# Altium PCB PCB1.PcbDoc
Units mil, origin at the board's own origin, x right, y up, seen from the top; angles counter-clockwise.
Board outline 1775 x 1495 mil, 2 copper layers (Top Layer, Bottom Layer); 22 components, 51 nets, 85 pads, 0 vias.
Unrouted connection lines stored in the file: 43.
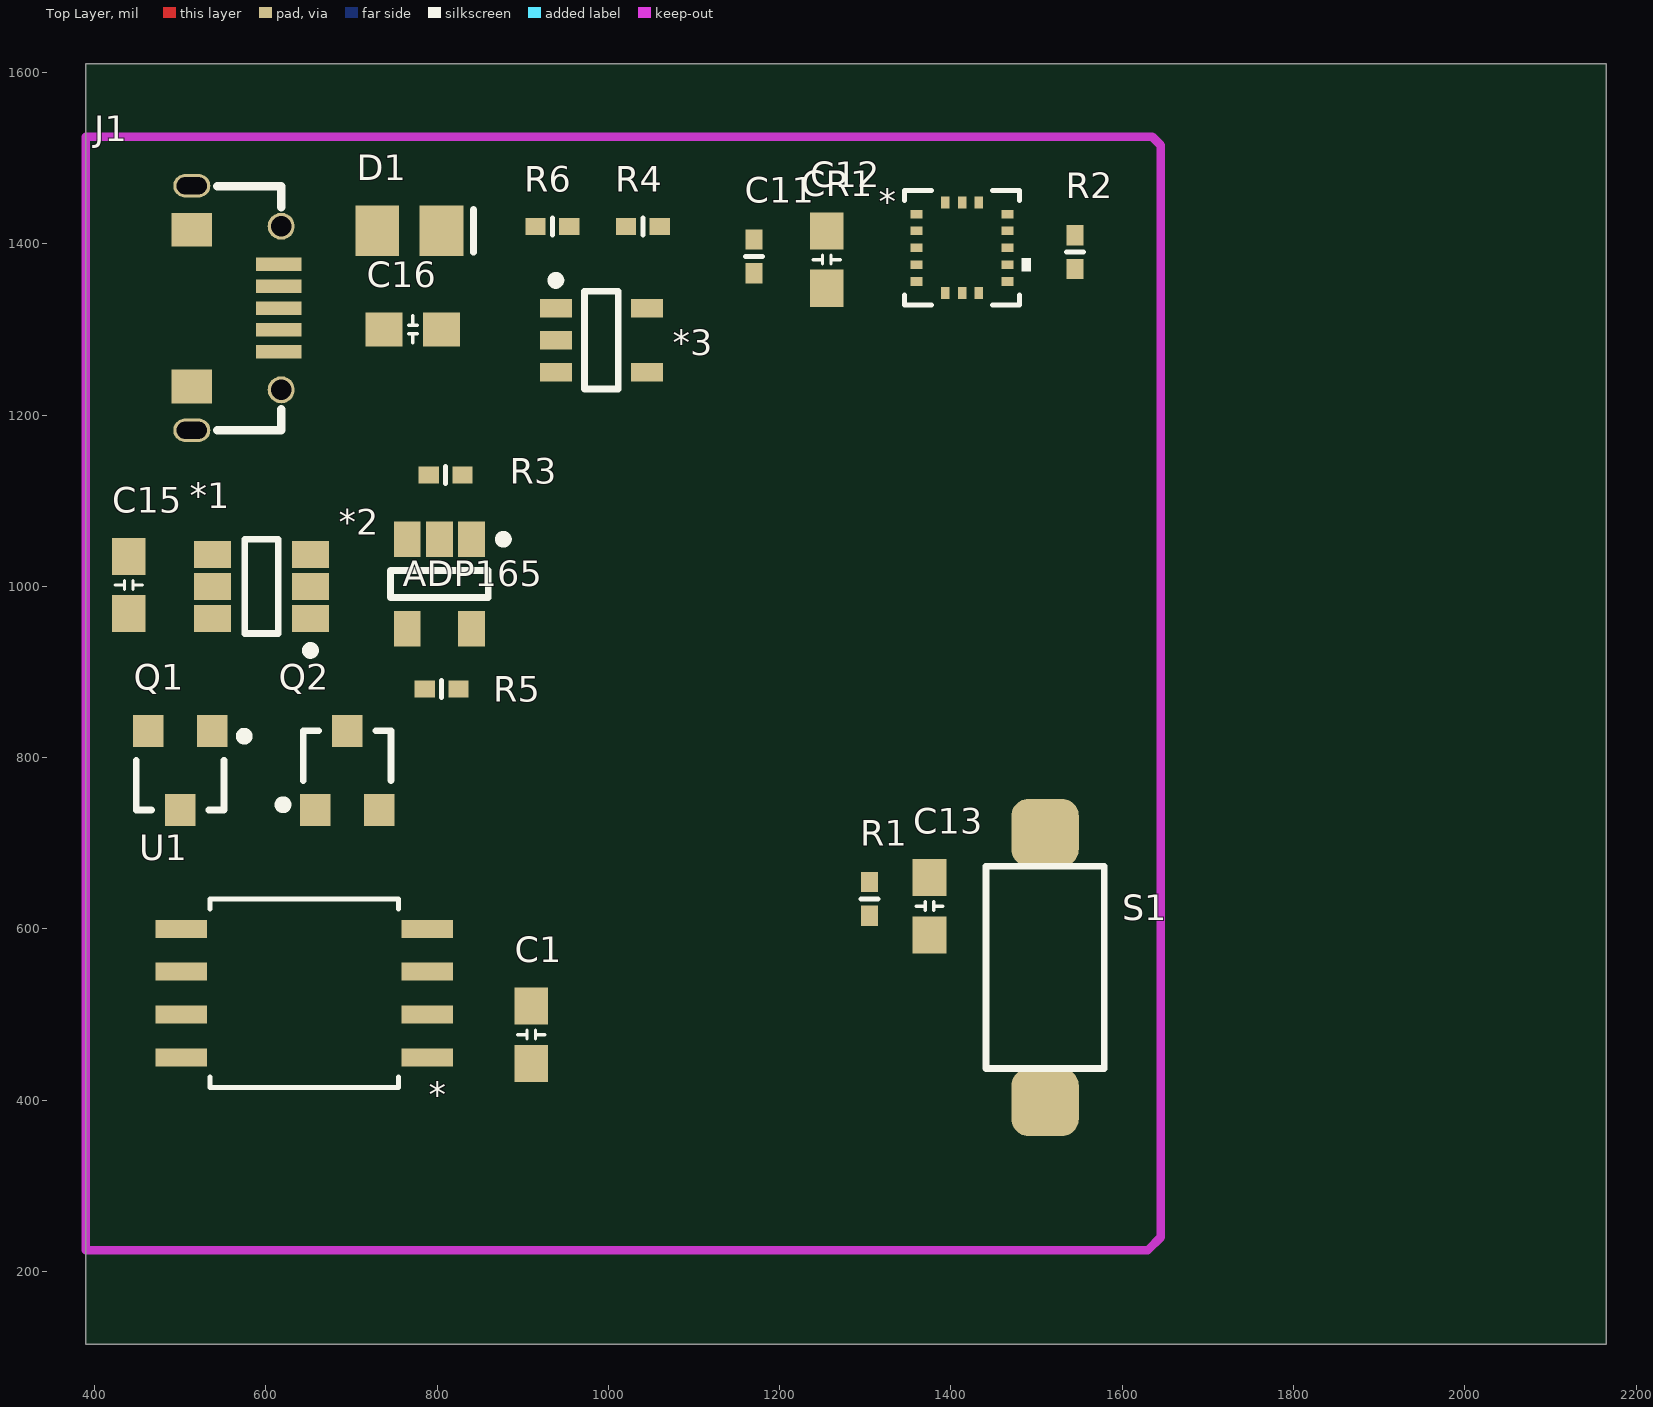
[diagram p0: Top Layer view]
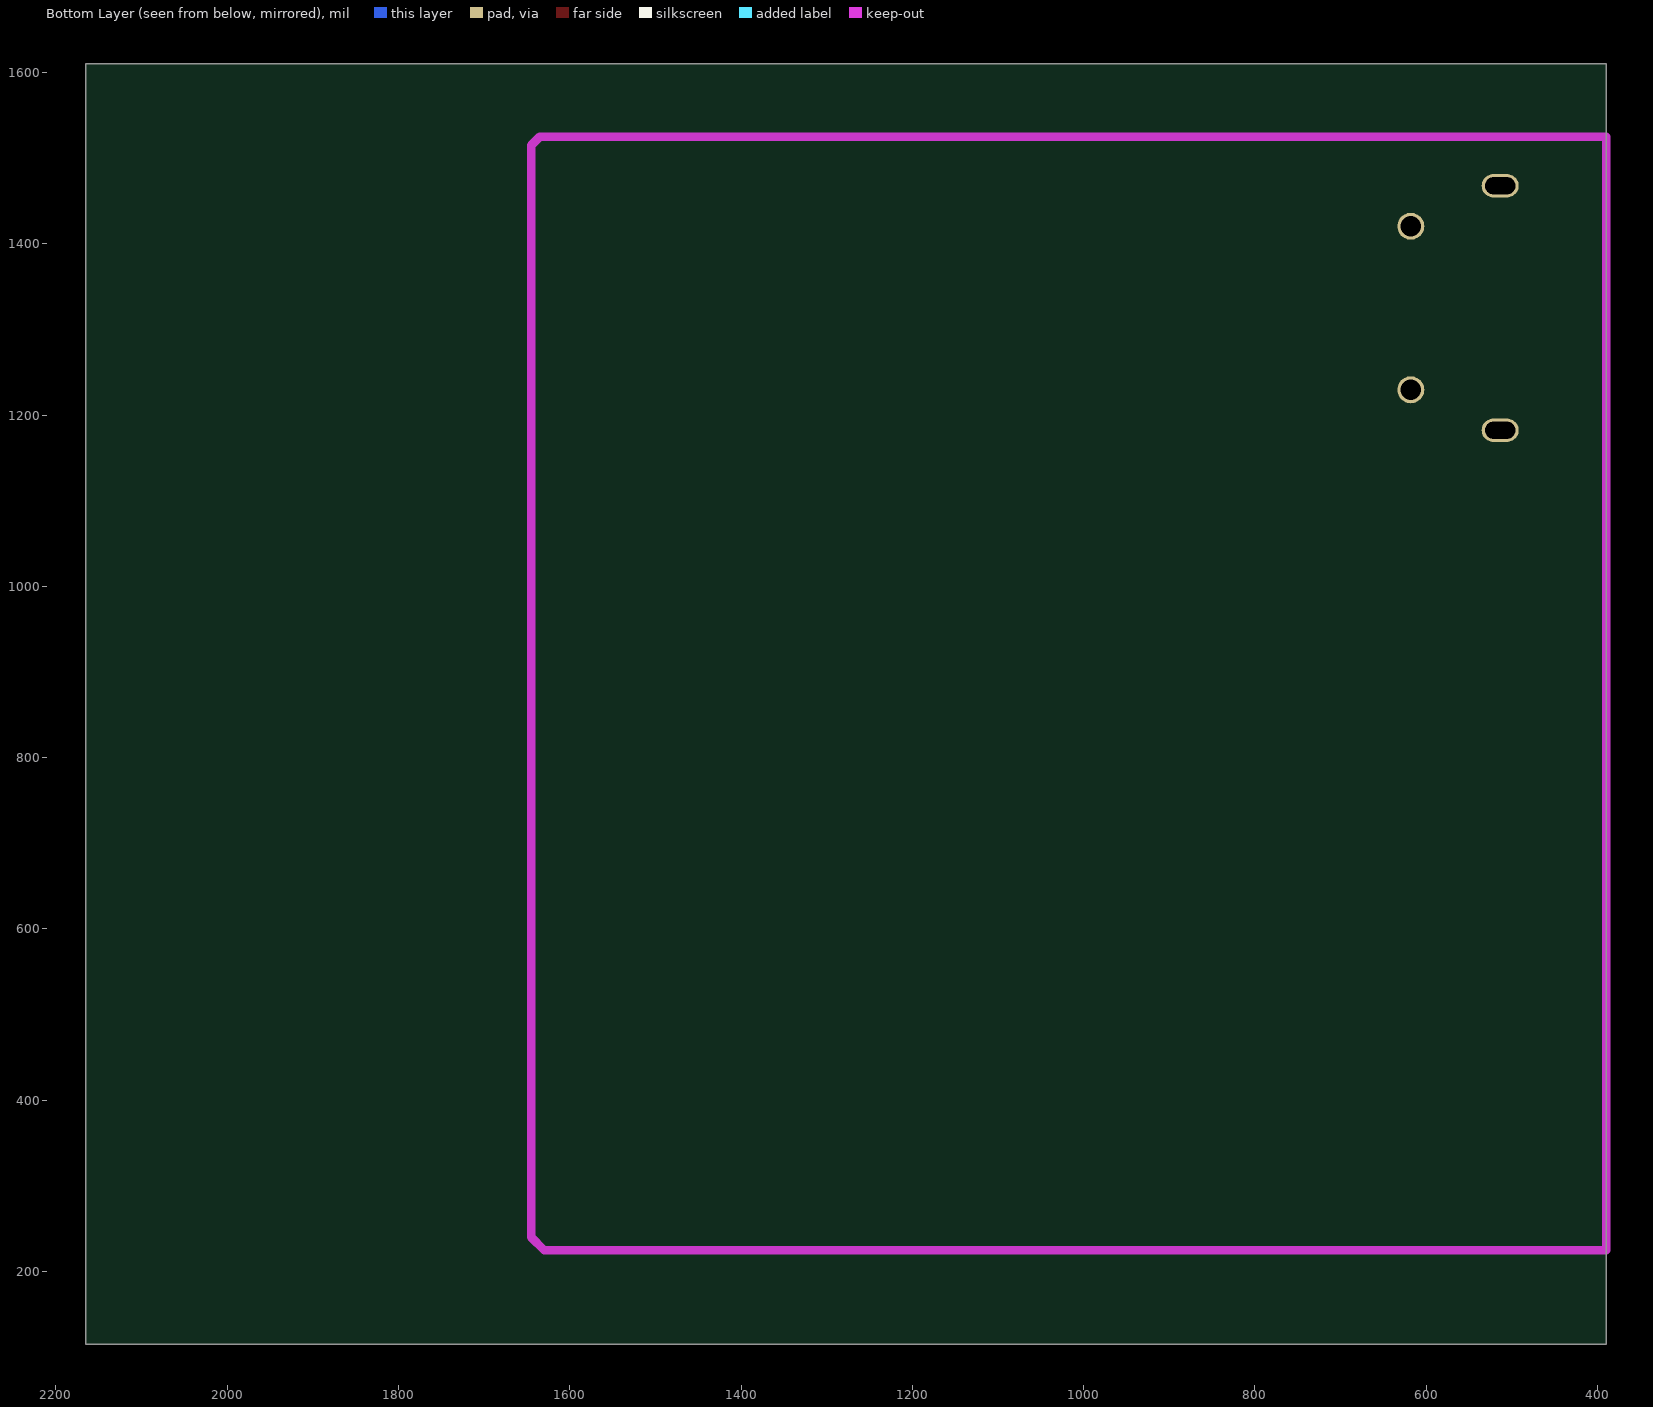
[diagram p1: Bottom Layer view, seen from below]

## Layer stack, top to bottom
Top Solder: solder mask 0.4, Solder Resist, Dk 3.5
Top Layer: signal copper 1.4
Dielectric 1: dielectric 12.6, FR-4, Dk 4.8
Bottom Layer: signal copper 1.4
Bottom Solder: solder mask 0.4, Solder Resist, Dk 3.5

## Board outline
390,115 390,1610 2165,1610 2165,115

## Design rules (kind name [scope] priority, off if disabled: settings)
Clearance [All] p1: gap=4 ignorepadtopadclearanceinfootprint=FALSE
PolygonConnect [All] p1: connectstyle=Relief reliefconductorwidth=10 reliefentries=4 polygonreliefangle="90 Angle" airgapwidth=10
RoomDefinition Sheet1 [InComponentClass('Sheet1')] p1: confinementstyle=ConfineIn formatcopy=TRUE lockcomponents=FALSE outline 0,0 2000,0 2000,1000 0,1000
RoutingVias [All] p1: holewidth=28 width=50 viastyle="Through Hole" minholewidth=28 minwidth=50 maxholewidth=28 maxwidth=50
SolderMaskExpansion [All] p1: expansion=4 istentingtop=FALSE
Width [All] p1: maxlimit=10 minlimit=10 preferedwidth=10
30 further rules are at their usual default settings.

## Components (designator, comment, footprint, x,y, rotation, side; value= is the part's Value field where it differs from the comment)
*1 "DW01" DW01 595,1000 r180 top
*2 "ADP165" ADP165 802.6,1002.83 r270 top
*3 "TP4054" TP4054 991.85,1287.4 r0 top
C1 "Cap" Cap-0603 910,476.54 r90 top
C11 "100nF" CAP-0402 1170,1385.31 r90 top
C12 "10uF" Cap-0603 1255,1381.54 r90 top
C13 "Cap" Cap-0603 1375,626.54 r270 top
C15 "Cap" Cap-0603 440,1001.54 r90 top
C16 "Cap" Cap-0603 771.73,1300 r0 top
CR1 "LIS3DH" LGA-16_3x3x1mm_STM 1413,1395.32 r0 top
D1 "LED" LED-0805 767.6,1415 r0 top
J1 "micro usb" "micro usb" 615,1325 r90 top
Q1 "MOSFET-N2" SOT23-3 500,785 r180 top
Q2 "MOSFET-N2" SOT23-3 695,785 r0 top
R1 "Res" Res-0402 1305,635 r270 top
R2 "10k" Res-0402 1545,1390.31 r90 top
R3 "Res" Res-0402 810,1130 r0 top
R4 "Res" Res-0402 1040.31,1420 r0 top
R5 "Res" Res-0402 805.32,880 r180 top
R6 "Res" Res-0402 934.68,1420 r180 top
S1 "KEY" KEY 1510,555 r90 top
U1 "W25Q128JVSIQ" SOIC_128JVSIQ_WIN 645,525 r180 top

## Footprints (in the part's own frame and the unit in brackets; to place one, negate y for a bottom-side part, rotate by r counter-clockwise, add the part's x,y. Pads: shape width x height; smd on the part's side, far side on the other; paste and mask are expansions set on the pad)
ADP165 [mm] "SOT23, 5-Leads, Body 2.90x2.80mm, Pitch 0.95mm, IPC Medium Density"
  rect 1.05x0.8 smd: 1(-1.325,0.95) 2(-1.325,0) 3(-1.325,-0.95) 4(1.325,-0.95) 5(1.325,0.95)
  silkscreen extent -1.45,-1.45 0.4,2.03, body extent -0.8,-1.45 0.8,1.45, height 1
CAP-0402 [mm]
  rect 0.6x0.5 smd: 1(-0.5,0) 2(0.5,0)
  silkscreen extent 0,-0.25 0,0.25, body extent -0.5,-0.25 0.5,0.25, height 0.5
Cap-0603 [mm]
  rect 1.1x1 smd: 1(-0.85,0) 2(0.85,0)
  silkscreen extent -0.13,-0.4 0.13,0.4, body extent -0.8,-0.4 0.8,0.4, height 0.6
DW01 [mm] "SOT23, 6-Leads, Body 2.95x2.75mm, Pitch 0.95mm, IPC Medium Density"
  rect 1.1x0.8 smd: 1(-1.45,0.95) 2(-1.45,0) 3(-1.45,-0.95) 4(1.45,-0.95) 5(1.45,0) 6(1.45,0.95)
  silkscreen extent -1.58,-1.4 0.5,2.02, body extent -0.9,-1.4 0.9,1.4, height 1.3
KEY [mm]
  rrect50% 2x2 smd: 1(-4,0) 2(4,0)
  silkscreen extent -3,-1.75 3,1.75, body extent -4.5,-1.75 4.5,1.75, height 4.5
LED-0805 [mm] "贴片LED"
  rect 1.3x1.5 smd: 1(-0.95,0) 2(0.95,0)
  silkscreen extent 1.91,-0.64 1.91,0.64, body extent -1.01,-0.62 1.01,0.63, height 1.1
LGA-16_3x3x1mm_STM [mil]
  rect 14x10 smd paste-1.4 mask+2: 1(-53,39.37) 2(-53,19.68) 3(-53,0) 4(-53,-19.68) 5(-53,-39.37) 9(53,-39.37) 10(53,-19.68) 11(53,0) 12(53,19.68) 13(53,39.37)
  rect 10x14 smd paste-1.4 mask+2: 6(-19.68,-53) 7(0,-53) 8(19.69,-53) 14(19.69,53) 15(0,53) 16(-19.68,53)
  silkscreen extent -67,-67 80,67, body extent -62,-62 62,62, height 39
"micro usb" [mm]
  rect 0.4x1.35 smd: 1(1.3,0) 2(0.65,0) 3(0,0) 4(-0.65,0) 5(-1.3,0)
  oval 0.7x1.1 hole 0.5 slot 0.9 at 90 deg: ""(-3.625,2.575) ""(3.625,2.575)
  round 0.8 hole 0.6: ""(-2.425,-0.075) ""(2.425,-0.075)
  rect 1x1.2 smd: ""(-2.325,2.575) ""(2.325,2.575)
  silkscreen extent -3.62,-0.07 3.61,1.81, body extent -4.32,-0.31 4.33,5.59, height 2.78
Res-0402 [mm]
  rect 0.6x0.5 smd: 1(-0.5,0) 2(0.5,0)
  silkscreen extent 0,-0.25 0,0.25, body extent -0.5,-0.25 0.5,0.25, height 0.38
SOIC_128JVSIQ_WIN [mil]
  rect 60x21 smd paste+0 mask+0: 1(-143.5,75) 2(-143.5,25) 3(-143.5,-25) 4(-143.5,-75) 5(143.5,-75) 6(143.5,-25) 7(143.5,25) 8(143.5,75)
  silkscreen extent -110,-110 110,110, body extent -159,-105 159,105, height 85
SOT23-3 [mm]
  rect 0.9x0.95 smd: 1(-0.95,-1.175) 2(0.95,-1.175) 3(0,1.175)
  silkscreen extent -2.03,-1.14 1.3,1.18, body extent -1.45,-1.4 1.45,1.4, height 1.2
TP4054 [mm] "SOT23, 5-Leads, Body 2.90x2.80mm, Pitch 0.95mm, IPC Medium Density"
  rect 0.95x0.55 smd: 1(-1.35,0.95) 2(-1.35,0) 3(-1.35,-0.95) 4(1.35,-0.95) 5(1.35,0.95)
  silkscreen extent -1.47,-1.45 0.5,1.9, body extent -0.87,-1.45 0.87,1.45, height 1

## Part data
*1: "锂电池放电能量管理芯片"
*2: "线性稳压器"
*3: "充电管理芯片"
C11 C12: library part Cap
CR1: "加速度传感器模块", Mfr_Name=STMicroelectronics, Copyright="Copyright (C) 2023 Ultra Librarian. All rights reserved.", Manufacturer_Part_Number=LIS3DH, RefDes=RefDes, Type=DEV
D1: "充电指示灯"
Q1 Q2: "N-Channel MOSFET", PackageDocument=1995/1996, LatestRevisionDate=17-Jul-2002, LatestRevisionNote="Re-released for DXP Platform.", PackageReference=E3, Published=8-Jun-2000, Publisher="Altium Limited"
R2: library part Res
U1: "128M闪存", Mfr_Name=Winbond, Copyright="Copyright (C) 2023 Ultra Librarian. All rights reserved.", Manufacturer_Part_Number=W25Q128JVSIQ, RefDes=RefDes, Type=DEV

## Nets (pads, with @x,y where several pads share a name; then routed paths per layer and width w, separated by ;. In a path a pad name is that pad's centre, name@x,y a point inside that pad or via, vN(x,y) a via of type N, cw(c..) or ccw(c..) an arc to the next point about the centre after c; other vN are vias at no path point)
BAT+: *2.1 *2.3 *3.3 R3.2
DEC1: 
DEC2: 
DEC3: 
DEC4: 
FLASH_CS: U1.1
FLASH_MISO: U1.2
FLASH_MOSI: U1.5
FLASH_SCK: U1.6
GND: *2.2 *2.5 *3.2 C1.2 C11.1 C12.1 C13.1 C16.2 CR1.5 CR1.12 J1.5 Q2.2 R4.2 R5.1 S1.1 U1.4
Net*1_1: *1.1 Q1.1
Net*1_2: *1.2 R5.2
Net*1_3: *1.3 Q2.1
Net*1_5: *1.5 C15.2 R3.1
Net*3_1: *3.1 R6.1
Net*3_4: *3.4 C16.1 D1.1 J1.1
Net*3_5: *3.5 R4.1
NetC?_2: 
NetCR1_8: CR1.8 R2.1
NetD1_2: D1.2 R6.2
nRESET: C13.2 R1.2 S1.2
P0.11: 
P0.12: 
P0.13: 
P0.14: 
P0.15: 
P0.16: 
P0.17: 
P0.18: 
P0.19: 
P0.20: 
P0.22: 
P0.23: 
P0.24: 
P0.25: 
P0.26: 
P0.27: 
P0.28/AIN4: 
P0.29/AIN5: 
P0.30/AIN6: 
P0.31/AIN7: 
RF: 
SCL: CR1.4
SDA: CR1.6
SWDCLK: 
SWDIO: 
VCC: *2.4 C1.1 C11.2 C12.2 CR1.14 R1.1 R2.2 U1.3 U1.7 U1.8
VDD_nRF: 
VIN-: *1.6 C15.1 Q1.2
XC1: 
XC2: 
pads on no net: *1.4 CR1.1 CR1.2 CR1.3 CR1.7 CR1.9 CR1.10 CR1.11 CR1.13 CR1.15 CR1.16 J1. J1.2 J1.3 J1.4 Q1.3 Q2.3

## Keep-outs
Keep-Out Layer:
  lines w10: 390,225 390,1525 1635,1525 1645,1515 1645,240 1630,225 390,225

## Text inside footprints (layer, text, board x,y; h text height)
CR1: Top Overlay "*" at 1315.5,1434.53 h30; Mechanical 13 "*" at 1354.5,1434.53 h30
U1: Top Overlay "*" at 811,434 h30 r180; Mechanical 13 "*" at 747.5,473 h30 r180